# Altium PCB WiFiPassThrough.PcbDoc
Units mm, origin at the board's own origin, x right, y up, seen from the top; angles counter-clockwise.
Board outline 20 x 38 mm, 2 copper layers (Top Layer, Bottom Layer); 18 components, 12 nets, 62 pads, 17 vias.
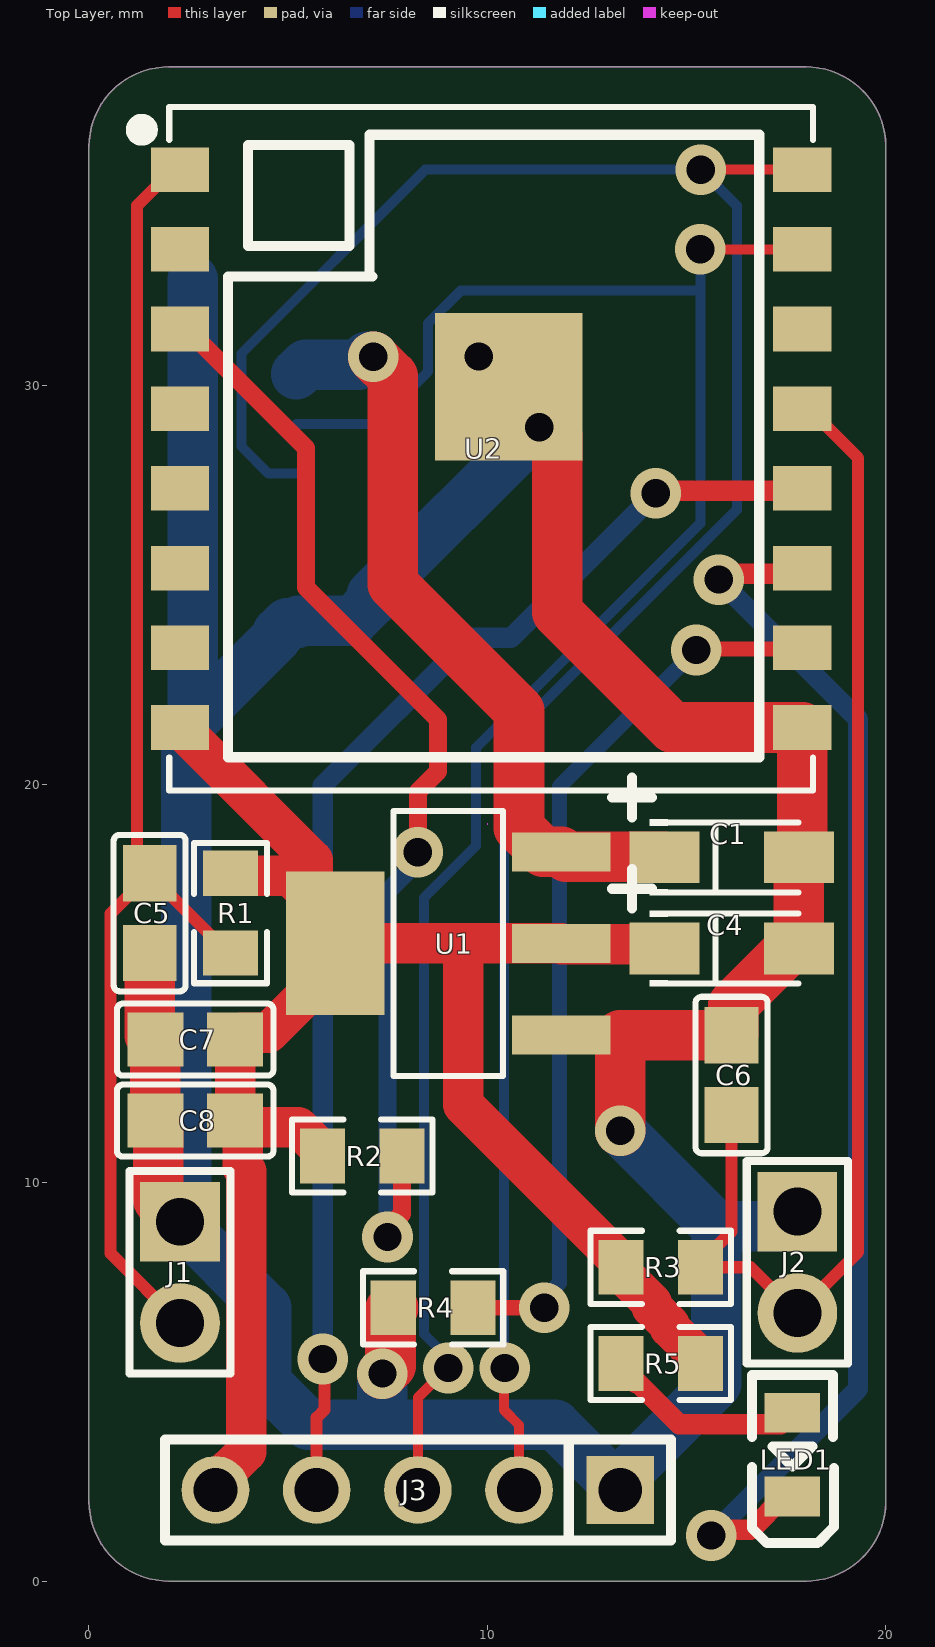
[diagram p0: Top Layer view]
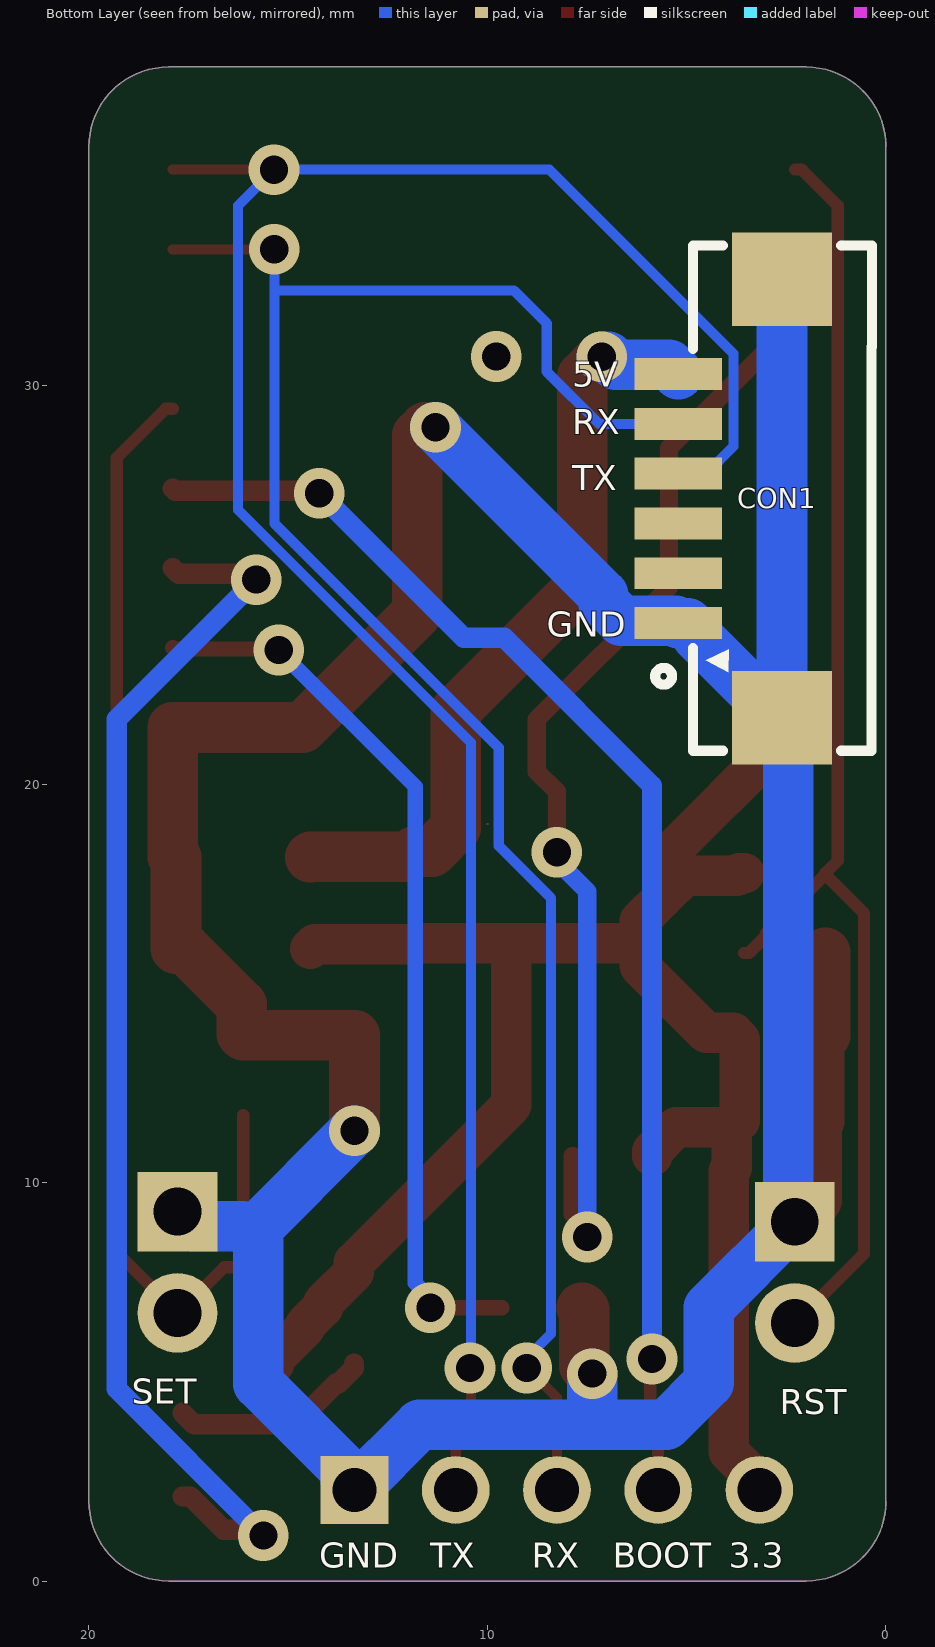
[diagram p1: Bottom Layer view, seen from below]
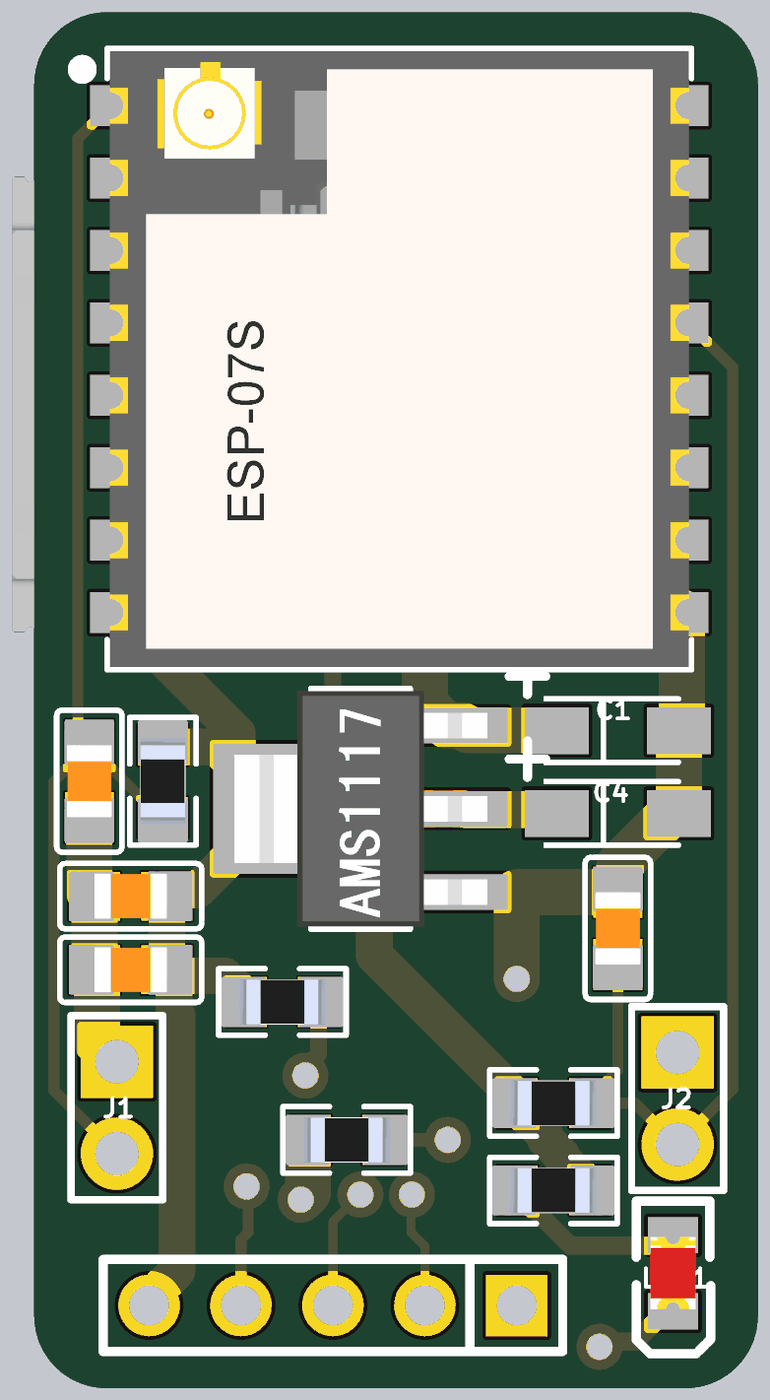
[diagram p2: 3D render of the assembled board from above, using the file's embedded part models]

## Layer stack, top to bottom
Top Solder: solder mask 0.0102, Solder Resist, Dk 3.5
Top Layer: signal copper 0.0356
Dielectric 1: dielectric 0.32, FR-4, Dk 4.8
Bottom Layer: signal copper 0.0356
Bottom Solder: solder mask 0.0102, Solder Resist, Dk 3.5

## Board outline
0,2 0,36 cw(c2,36) 2,38 18,38 cw(c18,36) 20,36 20,2 cw(c18,2) 18,0 2,0 cw(c2,2)

## Design rules (kind name [scope] priority, off if disabled: settings)
Clearance [All] p1: gap=0.152 ignorepadtopadclearanceinfootprint=FALSE
ComponentClearance [All] p1: gap=0 collisioncheckmode=3 verticalgap=0 showdistances=FALSE
HoleSize [All] p1: absolutevalues=TRUE maxlimit=25.4 minlimit=0.025 maxpercent=80.000 minpercent=20.000
HoleToHoleClearance [All] p1: gap=0.152 allowstackedmicrovias=TRUE
MinimumSolderMaskSliver [All] p1: minsoldermaskwidth=0.102
PolygonConnect [All] p1: connectstyle=Relief reliefconductorwidth=0.254 reliefentries=4 polygonreliefangle="90 Angle" airgapwidth=0.254
RoutingVias [All] p1: holewidth=0.711 width=1.27 viastyle="Through Hole" minholewidth=0.711 minwidth=1.27 maxholewidth=0.711 maxwidth=1.27
SilkToSilkClearance [All] p1: silktosilkclearance=0
SilkToSolderMaskClearance [IsPad] p1: minsilkscreentomaskgap=0 clearancetoexposedcopper=TRUE
SolderMaskExpansion [All] p1: expansion=0.102 istentingtop=FALSE
Width [All] p1: maxlimit=1.27 minlimit=0.152 preferedwidth=0.203
24 further rules are at their usual default settings.

## Classes and differential pairs
net class Power: GND VCC3.3 VCC5V

## Components (designator, comment, footprint, x,y, rotation, side; value= is the part's Value field where it differs from the comment)
C1 "10uF" CAP-SMD_L3.2-W1.6-RD-C7171 16.129,18.161 r0 top
C4 "10uF" CAP-SMD_L3.2-W1.6-RD-C7171 16.129,15.875 r0 top
C5 "1uF" C0805 1.524,16.764 r90 top
C6 "1uF" C0805 16.129,12.7 r270 top
C7 "10uF" C0805 2.667,13.589 r0 top
C8 "0.1uF" C0805 2.667,11.557 r0 top
CON1 "HC-1.25-6PWT" CONN-SMD_6P-P1.25_HC-1.25-6PWT 3.907,27.168 r90 bottom
J1 "Header 2" HDR-TH_2P-P2.54-V-M 2.286,7.747 r270 top
J2 "Header 2" HDR-TH_2P-P2.54-V-M 17.78,8.001 r270 top
J3 "PZ254V-11-05P" HDR-TH_5P-P2.54-V-M 8.255,2.286 r180 top
LED1 "NCD0805R1" LED0805-R-RD 17.653,3.175 r90 top
R1 "12K" R0805 3.556,16.764 r90 top
R2 "12K" R0805 6.858,10.668 r0 top
R3 "12K" R0805 14.351,7.874 r180 top
R4 "12K" R0805 8.636,6.858 r180 top
R5 "1K" R0805 14.351,5.461 r0 top
U1 "AMS1117-3.3" AMS1117-SOT-223-4 9.017,16.002 r0 top
U2 "ESP-07S" WIRELM-SMD_ESP-07S 10.091,28.422 r270 top value=2.4GHz

## Footprints (in the part's own frame and the unit in brackets; to place one, negate y for a bottom-side part, rotate by r counter-clockwise, add the part's x,y. Pads: shape width x height; smd on the part's side, far side on the other; paste and mask are expansions set on the pad)
AMS1117-SOT-223-4 [mm] "稳压芯片"
  rect 2.47x0.98 smd: 1(2.835,-2.3) 2(2.835,0) 3(2.835,2.3)
  rect 2.47x3.6 smd: 4(-2.835,0)
  silkscreen extent -1.37,-3.33 1.37,3.33, body extent -3.49,-3.25 3.51,3.25, height 1.86
C0805 [mm]
  rect 1.41x1.35 smd paste-100 mask+0.051: 1(-1,0) 2(1,0)
  silkscreen extent -1.96,-0.9 1.96,0.9, body extent -1,-0.63 1,0.63, height 0.8
CAP-SMD_L3.2-W1.6-RD-C7171 [mm] "钽电容-10uF-16V"
  rect 1.758x1.296 smd: 1(-1.686,0) 2(1.686,0)
  silkscreen extent -3,-0.95 1.68,2
CONN-SMD_6P-P1.25_HC-1.25-6PWT [mm]
  rect 0.8x2.2 smd paste+0 mask+0.05: 1(-3.125,1.3) 2(-1.875,1.3) 3(-0.625,1.3) 4(0.625,1.3) 5(1.875,1.3) 6(3.125,1.3)
  rect 2.35x2.5 smd paste+0 mask+0.05: 7(-5.505,-1.3) 8(5.505,-1.3)
  silkscreen extent -6.33,-3.56 6.35,1.88, body extent -6.29,-4.51 6.29,2.29, height 2.6
HDR-TH_2P-P2.54-V-M [mm]
  rect 2x2 hole 1.2: 1(-1.27,0)
  round 2 hole 1.2: 2(1.27,0)
  silkscreen extent -2.54,-1.27 2.54,1.27
HDR-TH_5P-P2.54-V-M [mm]
  rect 1.7x1.7 hole 1.1: 1(-5.08,0)
  round 1.7 hole 1.1: 2(-2.54,0) 3(0,0) 4(2.54,0) 5(5.08,0)
  silkscreen extent -6.35,-1.27 6.35,1.27
LED0805-R-RD [mm]
  rect 1x1.4 smd: 1(1.05,0) 2(-1.05,0)
  silkscreen extent -2.22,-1.04 1.99,1.01, body extent -1,-0.63 1,0.63, height 1.11
R0805 [mm] "3mm*1.3mm"
  rect 1.133x1.377 smd paste-100 mask+0.051: 1(-1,0) 2(1,0)
  silkscreen extent -1.76,-0.92 1.76,0.92, body extent -1.2,-0.63 1.2,0.63, height 0.55
WIRELM-SMD_ESP-07S [mm]
  rect 1.12x1.465 smd: 1(-7,-7.807) 2(-5,-7.807) 3(-3,-7.807) 4(-1,-7.807) 5(1,-7.807) 6(3,-7.807) 7(5,-7.807) 8(7,-7.807) 9(7,7.807) 10(5,7.807) 11(3,7.807) 12(1,7.807) 13(-1,7.807) 14(-3,7.807) 15(-5,7.807) 16(-7,7.807)
  rect 3.7x3.7 smd paste+0 mask+0.05: 17(-1.55,0.45)
  silkscreen extent -8.58,-8.96 8.58,8.08, body extent -8.5,-8 8.5,8, height 3.28

## Part data
C1 C4: library part "Cap Pol", "极性电容"
C5 C6 C7 C8: library part Cap, "电容", LatestRevisionDate=17-Jul-2002, LatestRevisionNote="Re-released for DXP Platform.", PackageDescription="Radial Cap, Thru-Hole; 2 Leads; 0.3 in Pin Spacing", PackageReference=RAD-0.3, Published=8-Jun-2000, Publisher="Altium Limited", UnitPrice=0.02
CON1: Current Rating (Max)=2A, JLCPCB Part Class="Extended Part", LCSC Part Name="1x6P 间距:1.25mm 卧贴", Manufacturer=HCTL(华灿天禄), Operating Temperature Range=-25℃~+85℃, Add into BOM=yes, Contact Material=黄铜, Contact Plating=锡, Convert to PCB=yes, Datasheet=https://atta.szlcsc.com/upload/public/pdf/source/20230707/D26CCCA63A4ED0B68E63A615510D7FF9.pdf, Device=HC-1.25-6PWT, Manufacturer Part=HC-1.25-6PWT, Mounting Style=卧贴, Number of Pins=6P, Number of PINs Per Row=6, Number of Rows=1, Pins Structure=1x6P, Pitch=1.25mm, Reference Series=-, Row Spacing=-, Supplier=LCSC, Supplier Footprint=SMD,P=1.25mm,卧贴, Supplier Part=C2845383, Symbol=HC-1.25-6PWT
J1 J2: "Header, 2-Pin", LatestRevisionDate=17-Jul-2002, LatestRevisionNote="Re-released for DXP Platform.", Publisher="Altium Limited"
J3: library part "Header 5", Color=黑色, Current Rating (Max)=-, JLCPCB Part Class="Extended Part", LCSC Part Name="间距:2.54mm 1x5P 直插 方针", Manufacturer=XFCN(兴飞), Operating Temperature Range=-40℃~+105℃, Add into BOM=yes, Circluar Pins/Square Pins=方针, Contact Material=黄铜, Contact Plating=-, Convert to PCB=yes, Datasheet=https://atta.szlcsc.com/upload/public/pdf/source/20200309/C492404_E51533260F8710EFF5D4617281164C1D.pdf, Device=PZ254V-11-05P, Insulation Height=2.5mm, Length of End Connection Pin=3mm, Length of Mating Pin=6mm, Manufacturer Part=PZ254V-11-05P, Mounting Type=直插, Number of Pins=5P, Number of Rows=单排, Pin Structure=1x5P, Pitch=2.54mm, Row Spacing=-, Supplier=LCSC, Supplier Footprint=插件,P=2.54mm, Supplier Part=C492404, Symbol=PZ254V-11-05P, Voltage Rating (Max)=-
LED1: library part LED0805R1, Color Temperature=-, Emitted Color=红色, Forward Current=20mA, Forward Voltage (VF)=1.6V~2.6V, JLCPCB Part Class="Basic Part", Lens Color=无色透明透镜, Manufacturer=国星光电, Operating Temperature=-30℃~+85℃, Power Dissipation=65mW, Add into BOM=yes, Convert to PCB=yes, Datasheet=https://atta.szlcsc.com/upload/public/pdf/source/20200820/C84256_F0A75A43B3EAD75808600A0514C76B99.pdf, Device=NCD0805R1, Diode Configuration=独立二极管, Dominant Wavelength=615nm~630nm, Lamp Holder Type=-, LCSC Part Name=NCD0805R1, Luminous Intensity=67mcd~195mcd, Manufacturer Part=NCD0805R1, Mounting Sytle=-, Peak Wavelength=-, Supplier=LCSC, Supplier Footprint=0805, Supplier Part=C84256, Symbol=FC-2012HRK-620D, Viewing Angle=130°
R1 R2 R3 R4 R5: library part Res1, "电阻", LatestRevisionDate=17-Jul-2002, LatestRevisionNote="Re-released for DXP Platform.", PackageDescription="Axial Device, Thru-Hole; 2 Leads; 0.3 in Pin Spacing", PackageReference=AXIAL-0.3, Published=8-Jun-2000, Publisher="Altium Limited"
U1: library part AMS1117-3.3_C347222, Dropout Voltage=1.3V@(1A), JLCPCB Part Class="Extended Part", LCSC Part Name="输出:3.3V 电流:1A 耐压:12V", Manufacturer=UMW(友台半导体), MAX Output Current=1A, Maximum Input Voltage=12V, Operating Temperature=-, Output Voltage=3.3V, Power Supply Rejection Ratio (PSRR)=60dB@(120Hz), Add into BOM=yes, Convert to PCB=yes, Datasheet=https://atta.szlcsc.com/upload/public/pdf/source/20231109/155D79A26D9DB04352555A58D5969DC8.pdf, Device=AMS1117-3.3_C347222, Feature=-, Manufacturer Part=AMS1117-3.3, Noise=-, Number of Outputs=1, Output Polarity=正极, Output Type=固定, standby current=-, Supplier=LCSC, Supplier Footprint=SOT-223, Supplier Part=C347222, Symbol=AMS1117-3.3_C347222
U2: "ESP8266-07S", JLCPCB Part Class="Extended Part", LCSC Part Name=802.11b/g/n模块, Manufacturer=Ai-Thinker(安信可), Operating Temperature=-40℃~+125℃, Operating Voltage=3.3V, Output Power=19.5dBm, Receive  Current=-, Add into BOM=yes, Antenna Type=板载PCB天线, Convert to PCB=yes, Core Processor=ESP8266芯片, Datasheet=https://atta.szlcsc.com/upload/public/pdf/source/20161024/1477288471743.pdf, Device=ESP-07S_C82895, Manufacturer Part=ESP-07S, Send  Current=-, Sensitivity=-98dBm, Supplier=LCSC, Supplier Footprint=SMD,16x17mm, Supplier Part=C82895, Support Interface=I2C；HSPI；UART；I2S, Symbol=ESP-07S, Wireless Standard=-

## Via types
v1: diameter 1.27, hole 0.711, Top Layer to Bottom Layer, tented both sides, 10 vias
v2: diameter 1.27, hole 0.711, Top Layer to Bottom Layer, 7 vias

## Nets (pads, with @x,y where several pads share a name; then routed paths per layer and width w, separated by ;. In a path a pad name is that pad's centre, name@x,y a point inside that pad or via, vN(x,y) a via of type N, cw(c..) or ccw(c..) an arc to the next point about the centre after c; other vN are vias at no path point)
BOOT: J3.4 U2.12 | length 32.9
  Top Layer w0.305: J3.4 5.715,4.101 5.911,4.298 5.911,5.53 v1(5.869,5.572)
  Top Layer w0.508: v2(14.224,27.305) 14.283,27.364 17.84,27.364 U2.12
  Bottom Layer w0.508: v1(5.869,5.572) 5.869,19.966 9.579,23.676 10.595,23.676 v2(14.224,27.305)
GND: C1.2 C4.2 C5.1 C6.1 C7.1 C8.1 CON1.1 CON1.7 CON1.8 J1.1 J2.1 J3.1 R4.2 U1.1 U2.9 U2.17 | length 100.2
  Top Layer w1.27: C5.1 1.524,13.702 1.637,13.589 C7.1 C8.1 1.697,11.557 1.737,11.517 1.737,9.566 J1.1 ; v1(7.366,5.207) 7.567,5.408 7.567,6.804 7.621,6.858 R4.2 ; v2(11.303,28.956) 11.557,28.956 11.756,28.757 11.756,24.312 14.646,21.422 U2.9 17.898,18.174 17.885,18.161 C1.2 C4.2 17.585,15.875 16.169,14.459 16.169,13.74 C6.1 16.128,13.701 13.335,13.701 v1(13.335,11.303)
  Bottom Layer w1.27: CON1.8 CON1.7 ; v1(7.366,5.207) 7.366,4.069 7.22,3.923 ; v2(11.303,28.956) 7.094,24.747 7.094,24.567 6.633,24.106 5.27,24.106 CON1.1 4.977,24.043 4.742,23.808 4.742,23.723 2.682,21.663 CON1.7 ; v1(13.335,11.303) 15.875,8.763 15.875,8.636 ; J2.1 17.415,8.906 16.145,8.906 15.875,8.636 ; CON1.7 2.447,21.503 2.447,9.178 J1.1 4.447,6.856 4.447,4.983 5.507,3.923 7.22,3.923 ; 7.22,3.923 8.933,3.923 11.698,3.923 J3.1 13.55,2.501 13.55,2.755 15.748,4.953 15.748,8.509 15.875,8.636
  other v2: 9.779,30.734
LED: LED1.2 U2.11 | length 31.6
  Top Layer w0.508: v1(15.621,1.143) 15.767,1.289 16.617,1.289 17.453,2.125 LED1.2 ; v2(15.804,25.135) 15.947,25.279 17.755,25.279 U2.11
  Bottom Layer w0.508: v1(15.621,1.143) 19.304,4.826 19.304,21.634 v2(15.804,25.135)
NetLED1_1: LED1.1 R5.1 | length 5.1
  Top Layer w0.508: R5.1 13.351,5.339 13.727,4.963 13.791,4.963 14.817,3.937 17.365,3.937 LED1.1
NetR2_2: R2.2 U2.3 | length 28.3
  Top Layer w0.457: U2.3 2.456,31.422 5.444,28.434 5.444,24.94 8.763,21.621 8.763,20.319 8.255,19.811 v1(8.255,18.288) ; v1(7.493,8.636) 7.493,8.856 7.858,9.221 R2.2
  Bottom Layer w0.457: v1(7.493,8.636) 7.493,17.306 8.255,18.068 v1(8.255,18.288)
NetR4_1: R4.1 U2.10 | length 22.6
  Top Layer w0.381: R4.1 v1(11.43,6.858) ; v2(15.24,23.368) 15.267,23.395 17.871,23.395 U2.10
  Bottom Layer w0.381: v1(11.43,6.858) 11.43,7.099 11.811,7.48 11.811,19.939 v2(15.24,23.368)
REST: C5.2 J1.2 R1.1 U2.1 | length 33.6
  Top Layer w0.305: U2.1 2.111,35.422 1.208,34.519 1.208,18.08 C5.2 C5.2@1.524,17.734 ; J1.2 0.544,8.219 0.544,16.754 C5.2@1.524,17.734 ; R1.1 3.434,15.764 3.02,16.178 3.02,16.238 C5.2@1.524,17.734
RX: CON1.5 J3.3 U2.15 | length 49.4
  Top Layer w0.254: J3.3 8.255,4.599 9.001,5.346 v1(9.014,5.346) ; v2(15.346,33.422) U2.15
  Bottom Layer w0.254: CON1.5 7.199,29.043 8.509,30.353 8.509,31.565 9.329,32.385 15.346,32.385 ; v1(9.014,5.346) 9.014,5.591 8.407,6.198 8.407,17.147 9.714,18.454 9.714,20.913 15.346,26.545 15.346,32.385 ; v2(15.346,33.422) 15.346,32.385
SET: C6.2 J2.2 R3.1 U2.13 | length 31.1
  Top Layer w0.305: C6.2 16.129,8.774 15.351,7.996 R3.1 16.603,7.874 17.746,6.731 J2.2 19.304,8.255 19.304,28.189 18.071,29.422 U2.13
TX: CON1.4 J3.2 U2.16 | length 56.1
  Top Layer w0.254: v1(10.437,5.346) 10.414,5.323 10.414,4.297 10.795,3.916 J3.2 ; v2(15.356,35.422) U2.16
  Bottom Layer w0.254: CON1.4 4.507,27.793 3.828,28.473 3.828,30.809 8.441,35.422 v2(15.356,35.422) 16.26,34.518 16.26,26.885 10.414,21.038 10.414,5.368 v1(10.437,5.346)
VCC3.3: C4.1 C7.2 C8.2 J3.5 R1.2 R2.1 R3.2 R5.2 U1.2 U1.4 U2.8 | length 48.7
  Top Layer w1.016: U2.8 2.456,21.422 2.508,21.37 2.508,21.198 5.613,18.093 U1.4@5.613,17.136 ; J3.5 3.175,2.471 3.946,3.242 3.946,10.291 3.864,10.373 C8.2@3.864,11.39 ; R1.2 3.678,17.764 3.737,17.706 5.043,17.706 U1.4@5.613,17.136 ; R2.1 5.858,10.79 5.258,11.39 C8.2@3.864,11.39 ; C4.1 14.334,15.984 11.87,15.984 U1.2 9.398,16.002 ; R5.2 15.351,5.583 14.578,6.357 14.578,6.423 14.124,6.876 14.124,6.978 13.351,7.752 R3.2 13.351,7.996 9.398,11.949 9.398,16.002 ; C8.2@3.864,11.39 3.697,11.557 C8.2 C7.2 3.834,13.756 4.501,13.756 6.182,15.437 U1.4 ; U1.4@5.613,17.136 6.182,16.567 U1.4 ; U1.4 9.398,16.002
VCC5V: C1.1 CON1.6 U1.3 | length 19.4
  Top Layer w1.27: v1(7.133,30.724) 7.62,30.237 7.62,25.019 10.794,21.845 10.794,18.905 11.397,18.302 U1.3 11.98,18.174 14.43,18.174 C1.1
  Bottom Layer w1.27: CON1.6 5.442,30.528 6.774,30.528 6.97,30.724 v1(7.133,30.724)
pads on no net: CON1.2 CON1.3 U2.2 U2.4 U2.5 U2.6 U2.7 U2.14

## Keep-outs
Keep-Out Layer:
  circle w0.006: c10,19 r0.003
  lines w0.013: 0,2 ccw(c2,2) 2,0 18,0 ccw(c18,2) 20,2 20,36 ccw(c18,36) 18,38 2,38 ccw(c2,36) 0,36 0,2

## Silkscreen, mask and mechanical layers (free items; w line width, h text height)
Bottom Overlay:
  text "5V" at 7.874,29.972 h0.64
  text "RX" at 7.874,28.778 h0.64
  text "TX" at 7.874,27.381 h0.64
  text "GND" at 8.509,23.698 h0.64
  text "SET" at 18.923,4.445 h0.64
  text "RST" at 2.667,4.191 h0.64
  text "3.3" at 3.937,0.33 h0.64
  text "BOOT" at 6.858,0.33 h0.64
  text "RX" at 8.89,0.33 h0.64
  text "TX" at 11.43,0.33 h0.64
  text "GND" at 14.224,0.33 h0.64